# Altium PCB Accelerometer.PcbDoc
Units mil, origin at the board's own origin, x right, y up, seen from the top; angles counter-clockwise.
Board outline 800 x 1100 mil, 2 copper layers (Top Layer, Bottom Layer); 11 components, 14 nets, 60 pads, 8 vias.
Unrouted connection lines stored in the file: 12.
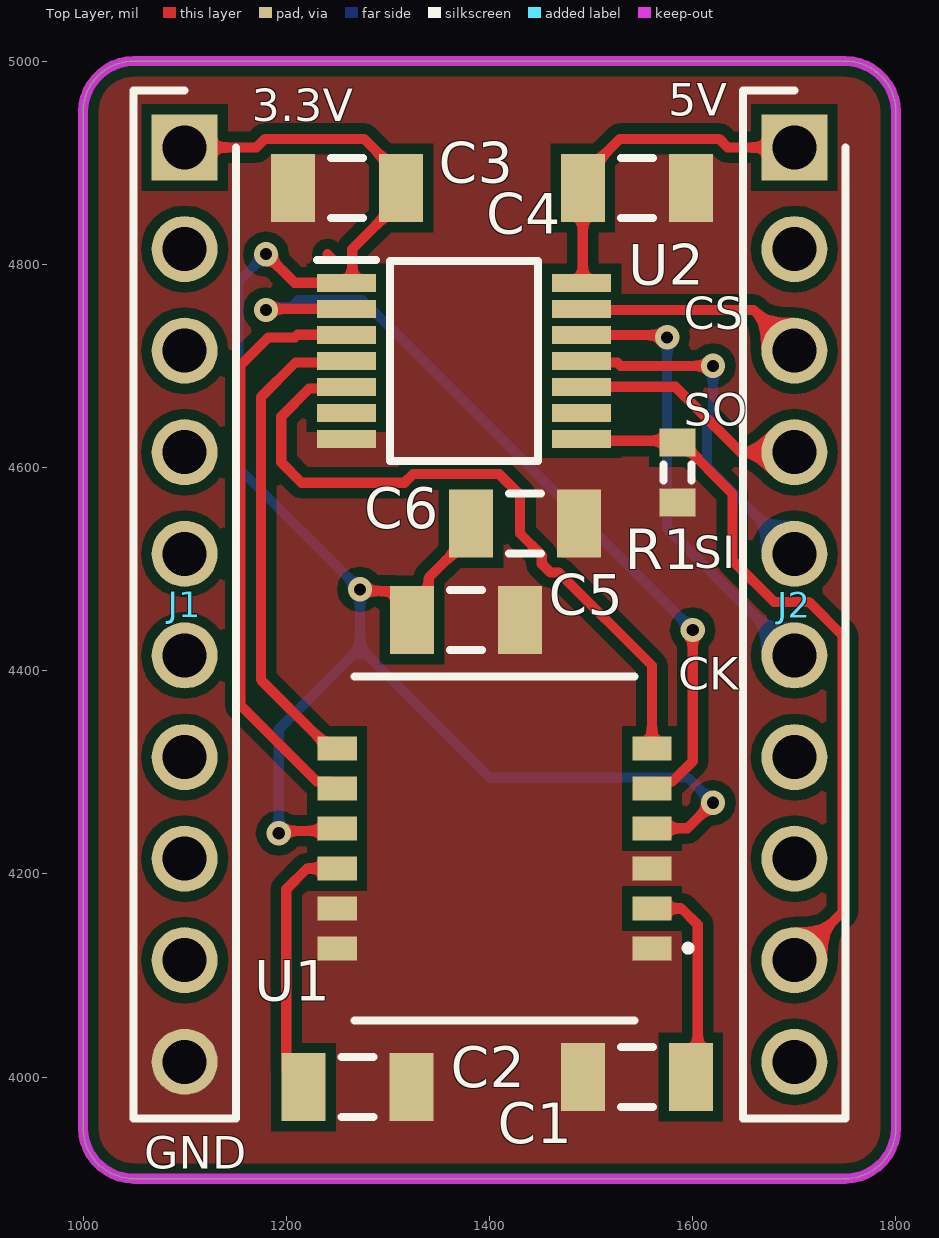
[diagram p0: Top Layer view]
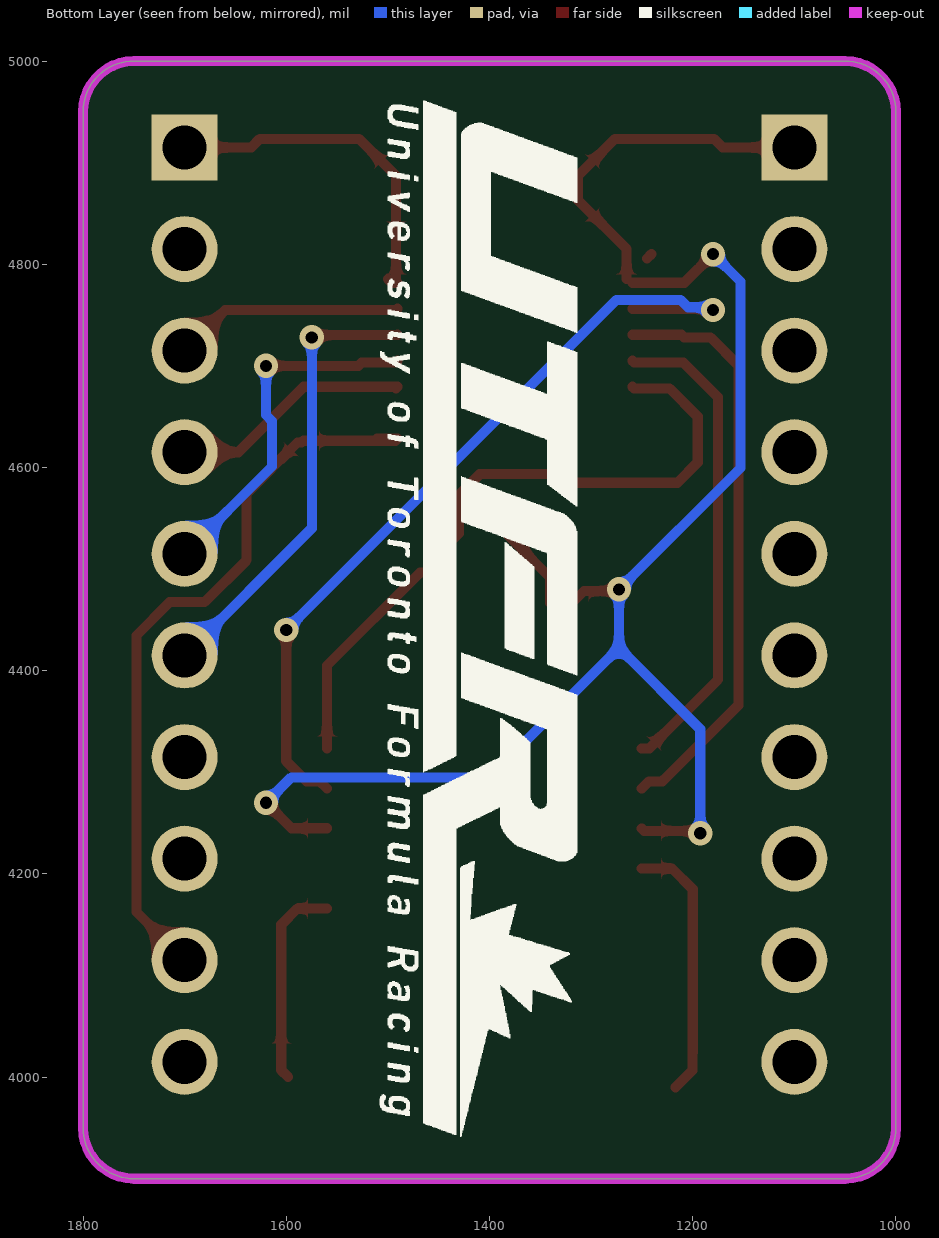
[diagram p1: Bottom Layer view, seen from below]

## Layer stack, top to bottom
Top Solder: solder mask 0.4, Solder Resist, Dk 3.5
Top Layer: signal copper 1.4
Dielectric 1: dielectric 12.6, FR-4, Dk 4.8
Bottom Layer: signal copper 1.4
Bottom Solder: solder mask 0.4, Solder Resist, Dk 3.5

## Board outline
1050,3900 cw(c1050,3950) 1000,3950 1000,4950 cw(c1050,4950) 1050,5000 1750,5000 cw(c1750,4950) 1800,4950 1800,3950 cw(c1750,3950) 1750,3900

## Design rules (kind name [scope] priority, off if disabled: settings)
Clearance [All] p1: gap=10 ignorepadtopadclearanceinfootprint=FALSE except(0: Arc-Hole Track-Hole SMDPad-Hole THPad-Hole Via-Hole Fill-Hole Poly-Hole Region-Hole Text-Hole; 5: SMDPad-SMDPad)
PolygonConnect PolygonConnect_2 [All vs IsNamedPolygon('GND_L01_P001')] p1: connectstyle=Direct reliefconductorwidth=10 reliefentries=4 polygonreliefangle="90 Angle" airgapwidth=10
PolygonConnect PolygonConnect_1 [All vs IsNamedPolygon('NONET_L01_P000')] p2: connectstyle=Direct reliefconductorwidth=10 reliefentries=4 polygonreliefangle="90 Angle" airgapwidth=10
PolygonConnect [All] p3: connectstyle=Relief reliefconductorwidth=10 reliefentries=4 polygonreliefangle="90 Angle" airgapwidth=10
RoutingVias [All] p1: holewidth=28 width=50 viastyle="Through Hole" minholewidth=28 minwidth=50 maxholewidth=28 maxwidth=50
SolderMaskExpansion [All] p1: expansion=4 istentingtop=FALSE
Width [All] p1: maxlimit=10 minlimit=10 preferedwidth=10
30 further rules are at their usual default settings.

## Components (designator, comment, footprint, x,y, rotation, side; value= is the part's Value field where it differs from the comment)
C1 "100nF" C1206 1545,4000 r180 top
C2 "100nF" C1206 1270,3990 r180 top
C3 "0.1uF" C1206 1260,4875 r180 top value=100nF
C4 "0.1uF" C1206 1545,4875 r0 top value=100nF
C5 "100nF" C1206 1376.85,4450 r180 top
C6 "100nF" C1206 1435,4545 r0 top
J1 "68000-210HLF" HDRV10W63P0X254_1X10_2540X241X858P 1100,4915 r270 top
J2 "68000-210HLF" HDRV10W63P0X254_1X10_2540X241X858P 1700,4915 r270 top
R1 "10K" J1-0603 1585,4595 r270 top
U1 "SCA3300-D01-1" SCA3300 1405,4225 r90 top
U2 "TXS0104EPWR" SOP65P640X120-14N 1375,4705 r0 top

## Footprints (in the part's own frame and the unit in brackets; to place one, negate y for a bottom-side part, rotate by r counter-clockwise, add the part's x,y. Pads: shape width x height; smd on the part's side, far side on the other; paste and mask are expansions set on the pad)
C1206 [mm] "Chip Capacitor, Body 3.2x1.6mm, IPC High Density"
  rect 1.1x1.7 smd: 1(-1.35,0) 2(1.35,0)
  silkscreen extent -0.4,-0.75 0.4,0.75, body extent -1.7,-0.9 1.7,0.9, height 1.3
HDRV10W63P0X254_1X10_2540X241X858P [mm]
  rect 1.65x1.65 hole 1.1: 1(0,0)
  round 1.65 hole 1.1: 2(2.54,0) 3(5.08,0) 4(7.62,0) 5(10.16,0) 6(12.7,0) 7(15.24,0) 8(17.78,0) 9(20.32,0) 10(22.86,0)
  silkscreen extent -1.42,-1.28 24.28,1.28, body extent -1.27,-1.2 24.13,1.2, height 8.58
J1-0603 [mm] "Chip Resistor, Body 1.6x0.8mm, IPC High Density"
  rect 0.7x0.9 smd: 1(-0.75,0) 2(0.75,0)
  silkscreen extent -0.2,-0.35 0.2,0.35, body extent -0.85,-0.48 0.85,0.48, height 0.9
SCA3300 [mm]
  rect 0.61x0.98 smd: 1(-2.5,-3.935) 2(-1.5,-3.935) 3(-0.5,-3.935) 4(0.5,-3.935) 5(1.5,-3.935) 6(2.5,-3.935) 7(2.5,3.935) 8(1.5,3.935) 9(0.5,3.935) 10(-0.5,3.935) 11(-1.5,3.935) 12(-2.5,3.935)
  silkscreen extent -4.3,-4.9 4.3,3.5
SOP65P640X120-14N [mm]
  rect 1.475x0.45 smd: 1(-2.938,1.95) 2(-2.938,1.3) 3(-2.938,0.65) 4(-2.938,0) 5(-2.938,-0.65) 6(-2.938,-1.3) 7(-2.938,-1.95) 8(2.938,-1.95) 9(2.938,-1.3) 10(2.938,-0.65) 11(2.938,0) 12(2.938,0.65) 13(2.938,1.3) 14(2.938,1.95)
  silkscreen extent -3.67,-2.5 1.85,2.52, body extent -3.2,-2.5 3.2,2.5, height 1.13

## Part data
C1 C2 C3 C4 C5 C6: library part "Cap Semi", "Capacitor (Semiconductor SIM Model)", LatestRevisionDate=29-May-2009, LatestRevisionNote="IPC-7351 Footprint Added.", PackageDescription="Chip Capacitor", PackageReference=C1206, Published=8-Jun-2000, Publisher="Altium Limited"
J1 J2: "Connector", Manufacturer_Name=Amphenol, Mouser Part Number=649-68000-210HLF, Arrow Part Number=68000-210HLF, Arrow Price/Stock=https://www.arrow.com/en/products/68000-210hlf/amphenol-fci, Datasheet Link=https://cdn.amphenol-icc.com/media/wysiwyg/files/drawing/68000.pdf, Height=8.58mm, Manufacturer_Part_Number=68000-210HLF, Mouser Price/Stock=https://www.mouser.co.uk/ProductDetail/Amphenol-FCI/68000-210HLF?qs=QKvFUfBIyQINb7f%2F4SDc2A%3D%3D
R1: library part Res3, "Resistor", LatestRevisionDate=29-May-2009, LatestRevisionNote="IPC-7351 Footprint Added.", PackageDescription="Chip Resistor", PackageReference=J1-0603, Published=8-Jun-2000, Publisher="Altium Limited"
U1: "Accelerometer", Manufacturer_Name="Murata Electronics", Mouser Part Number=81-SCA3300-D01-1, Arrow Part Number=SCA3300-D01-1, Arrow Price/Stock=https://www.arrow.com/en/products/sca3300-d01-1/murata-manufacturing, Datasheet Link=https://datasheet.datasheetarchive.com/originals/distributors/DKDS-31/605263.pdf, Manufacturer_Part_Number=SCA3300-D01-1, Mouser Price/Stock=https://www.mouser.co.uk/ProductDetail/Murata-Electronics/SCA3300-D01-1?qs=u4fy%2FsgLU9PJXg1inqbWiw%3D%3D
U2: "Integrated Circuit", Manufacturer_Name="Texas Instruments", Mouser Part Number=595-TXS0104EPWR, Arrow Part Number=TXS0104EPWR, Arrow Price/Stock=https://www.arrow.com/en/products/txs0104epwr/texas-instruments?region=nac, Datasheet Link=http://www.ti.com/lit/ds/symlink/txs0104e.pdf, Height=1.2mm, Manufacturer_Part_Number=TXS0104EPWR, Mouser Price/Stock=https://www.mouser.co.uk/ProductDetail/Texas-Instruments/TXS0104EPWR?qs=7kv20MEVUlglsv2MH6ZndA%3D%3D

## Via types
v1: diameter 24, hole 12, Top Layer to Bottom Layer, 8 vias

## Nets (pads, with @x,y where several pads share a name; then routed paths per layer and width w, separated by ;. In a path a pad name is that pad's centre, name@x,y a point inside that pad or via, vN(x,y) a via of type N, cw(c..) or ccw(c..) an arc to the next point about the centre after c; other vN are vias at no path point)
Arduino_5V: C4.1 J2.1 U2.14 | length 350.4
  Top Layer w10: U2.14@1500,4785.63 1496.14,4781.77 U2.14 1491.85,4782.95 C4.1 1491.85,4886.81 1528.5,4923.46 1626.02,4923.46 1634.48,4915 J2.1 J2.1@1695,4920
CS_A: U1.5 U2.2 | length 818.8
  Top Layer w10: v1(1180,4755) 1181.18,4756.18 U2.2 ; U1.5 1566.93,4291.06 1580.07,4291.06 1585.43,4296.42 1600,4310.99 v1(1600,4440)
  Bottom Layer w10: v1(1180,4755) 1182.68,4757.68 1204.68,4757.68 1212,4765 1275,4765 v1(1600,4440)
CS_ACCEL: J2.3 U2.13 | length 226.4
  Top Layer w10: U2.13 1491.85,4755 1660,4755 J2.3
GND: C1.2 C2.1 C3.2 C4.2 C5.1 C6.2 J1.10 R1.2 U1.1 U1.3 U1.11 U1.12 U2.7
MISO_A: U1.6 U2.5 | length 685.1
  Top Layer w10: U2.5 1257.6,4677.68 1222.68,4677.68 1195,4650 1195,4605 1215,4585 1316.2,4585 1324.67,4593.46 1409.72,4593.46 1430,4573.18 1430,4535 1451.5,4513.5 1451.5,4505.32 1460.28,4496.54 1468.46,4496.54 1559.92,4405.08 U1.6
MISO_Mega: J2.4 U2.10 | length 238
  Top Layer w10: U2.10@1492.08,4678 U2.10 1582.83,4679.41 1647.24,4615 J2.4
MOSI_A: U1.7 U2.4 | length 480.3
  Top Layer w10: U1.7 1242.8,4323.43 1175,4391.22 1175,4669.14 1209.13,4703.27 1257.6,4703.27 U2.4
MOSI_Mega: J2.5 U2.11 | length 354.5
  Top Layer w10: U2.11 1492.4,4703.27 1525.92,4703.27 1529.19,4700 v1(1620,4700)
  Bottom Layer w10: v1(1620,4700) 1620,4651.61 1614,4645.61 1614,4601 J2.5
NetC1_1: C1.1 U1.2 | length 204.5
  Top Layer w10: U1.2 1589.06,4165.94 1605,4150 1605,4006.85 C1.1
NetC2_2: C2.2 U1.10 | length 260.5
  Top Layer w10: C2.2 1200.2,4006.65 1200.2,4024.13 1200,4024.32 1200,4185 1220.32,4205.31 U1.10
OE: J2.9 R1.1 U2.8 | length 772.4
  Top Layer w10: U2.8@1510.85,4628.23 U2.8 1492.52,4626.38 1583.15,4626.38 R1.1 1588.94,4624.53 1639.02,4574.44 1639.02,4508.83 1680.33,4467.52 1714.63,4467.52 1747.48,4434.67 1747.48,4162.48 J2.9 ; J2.9@1681.54,4112.62 ccw(c1592.8,4163.64) J2.9@1686.83,4123.17 ; J2.9@1689.39,4129.75 cw(c1592.8,4163.64) J2.9@1686.83,4123.17 ; J2.9@1700,4110 J2.9@1686.83,4123.17
SCK_A: U1.8 U2.3 | length 580.4
  Top Layer w10: U1.8 1243.07,4291.06 1229.93,4291.06 1224.57,4296.42 1155,4365.99 1155,4700.69 1182.31,4728 1208.37,4728 1210.96,4730.59 U2.3
SCK_Mega: J2.6 U2.12 | length 450.1
  Top Layer w10: U2.12 1490.96,4730.3 1572.56,4730.3 v1(1574.85,4728)
  Bottom Layer w10: v1(1574.85,4728) 1574.85,4540.15 J2.6
VCC_3.3: C3.1 C5.2 C6.1 J1.1 U1.4 U1.9 U2.1 | length 1838.1
  Top Layer w10: J1.1 1170.52,4915 1178.98,4923.46 1276.5,4923.46 1313.15,4886.81 C3.1 1313.15,4863.19 1265,4815.04 U2.1@1265,4785.63 ; v1(1180,4810) 1208.23,4781.77 U2.1 ; v1(1192.52,4240.03) 1194.85,4242.36 1247.75,4242.36 U1.9 ; v1(1272.52,4480.03) 1274.09,4478.46 1307.05,4478.46 1318.7,4466.81 1318.7,4455 C5.2 1340.35,4466.65 1340.35,4491.69 1381.85,4533.19 C6.1 ; U1.4 1560.08,4244.84 1594.84,4244.84 v1(1620,4270)
  Bottom Layer w10: v1(1180,4810) 1153,4783 1153,4599.56 v1(1272.52,4480.03) 1272.52,4422.48 ; v1(1192.52,4240.03) 1192.52,4342.48 1272.52,4422.48 ; v1(1620,4270) 1595,4295 1400,4295 1272.52,4422.48
pads on no net: J1.2 J1.3 J1.4 J1.5 J1.6 J1.7 J1.8 J1.9 J2.2 J2.7 J2.8 J2.10 U2.6 U2.9
copper on no net: | length 6.2
  Top Layer w10: 1240.63,4810 1245,4805.63

## Polygon pours and split planes (outlines as drawn)
GND on Top Layer "GND_L01_P001" (solid, remove dead copper, pour order 1): 1000,3900 1000,5000 1800,5000 1800,3900

## Keep-outs
Keep-Out Layer:
  the board outline again, w10

## Silkscreen, mask and mechanical layers (free items; w line width, h text height)
Top Overlay:
  text "5V" at 1576,4946 h32
  text "3.3V" at 1166,4941 h32
  text "CS" at 1591,4736 h32
  text "SO" at 1591,4641 h32
  text "SI" at 1601,4501 h32
  text "CK" at 1586,4381 h32
  text "GND" at 1060,3910 h32
Bottom Overlay:
  drawing of 42 lines, arcs and shapes, not listed